# Altium PCB Array.PcbDoc
Units mm, origin at the board's own origin, x right, y up, seen from the top; angles counter-clockwise.
Board outline 150 x 30 mm, 2 copper layers (Top Layer, Bottom Layer); 20 components, 26 nets, 80 pads, 0 vias.
Unrouted connection lines stored in the file: 1.
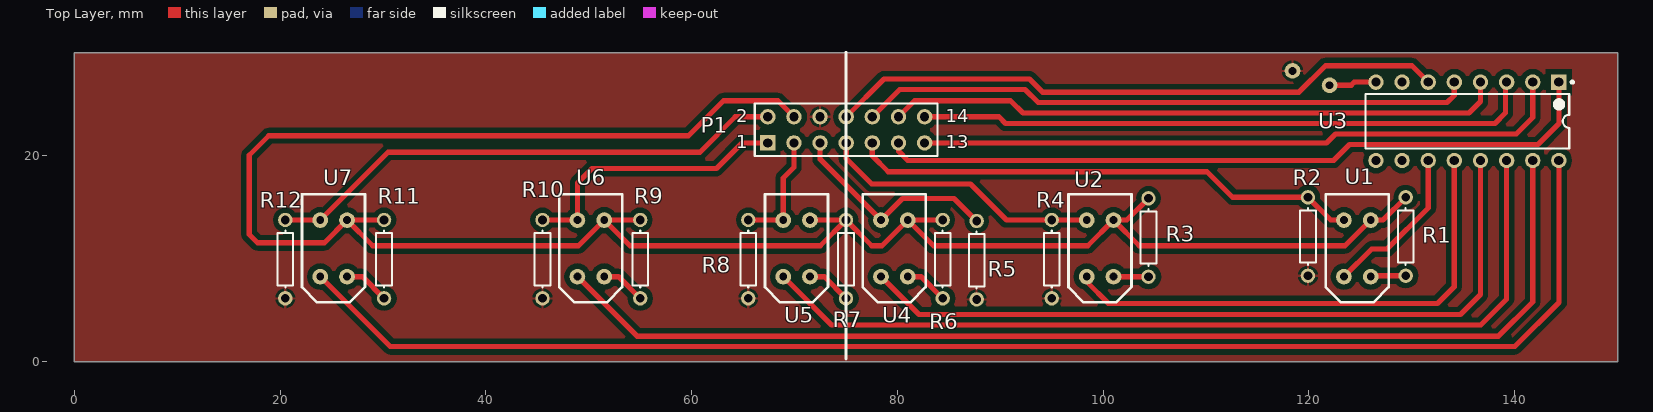
[diagram p0: Top Layer view]
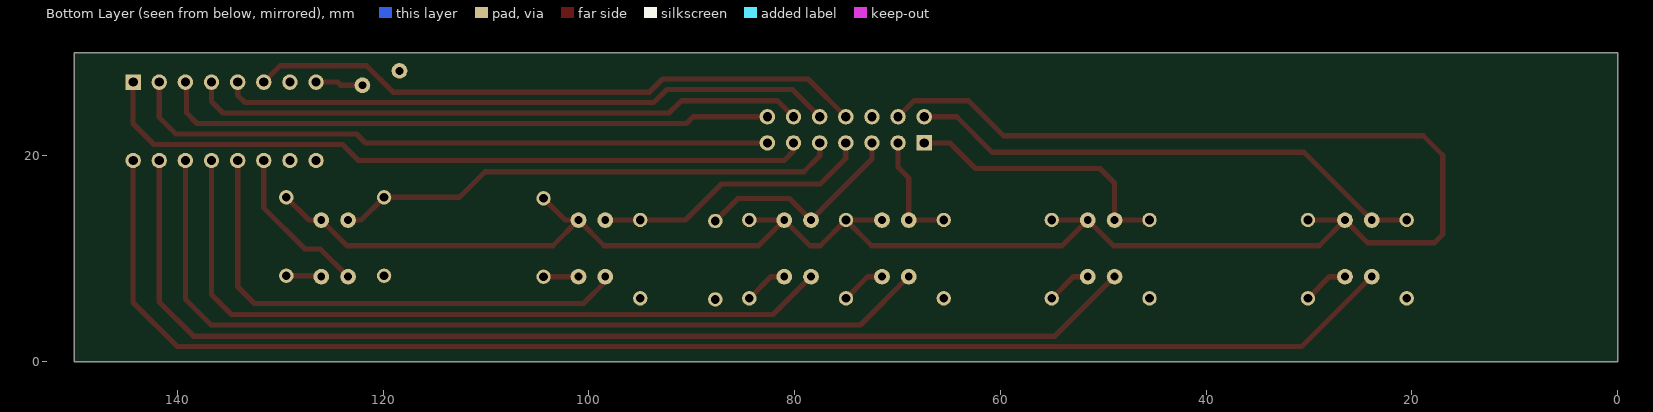
[diagram p1: Bottom Layer view, seen from below]

## Layer stack, top to bottom
Top Solder: solder mask 0.0102, Solder Resist, Dk 3.5
Top Layer: signal copper 0.0356
Dielectric 1: dielectric 0.32, FR-4, Dk 4.8
Bottom Layer: signal copper 0.0356
Bottom Solder: solder mask 0.0102, Solder Resist, Dk 3.5

## Board outline
0,0 0,30 150,30 150,0

## Design rules (kind name [scope] priority, off if disabled: settings)
Clearance [All] p1: gap=0.508
PolygonConnect [All] p1: connectstyle=Relief reliefconductorwidth=0.254 reliefentries=4 polygonreliefangle="90 Angle" airgapwidth=0.254
RoutingVias [All] p1: holewidth=0.711 width=1.27 viastyle="Through Hole" minholewidth=0.711 minwidth=1.27 maxholewidth=0.711 maxwidth=1.27
SolderMaskExpansion [All] p1: expansion=0.102
Width [All] p1: maxlimit=0.508 minlimit=0.254 preferedwidth=0.254
30 further rules are at their usual default settings.

## Components (designator, comment, footprint, x,y, rotation, side; value= is the part's Value field where it differs from the comment)
P1 "Header 7X2" HDR2X7 67.4,21.25 r0 top
R1 "Res3" AXIAL-0.3 129.4,12.15 r270 top
R2 "Res3" AXIAL-0.3 119.9,12.15 r270 top
R3 "Res3" AXIAL-0.3 104.4,12.05 r270 top
R4 "Res3" AXIAL-0.3 95,9.95 r270 top
R5 "Res3" AXIAL-0.3 84.4,9.95 r270 top
R6 "Res3" AXIAL-0.3 87.7,9.85 r270 top
R7 "Res3" AXIAL-0.3 75,9.95 r270 top
R8 "Res3" AXIAL-0.3 65.5,9.95 r270 top
R9 "Res3" AXIAL-0.3 55,9.95 r270 top
R10 "Res3" AXIAL-0.3 45.5,9.95 r270 top
R11 "Res3" AXIAL-0.3 30.1,9.95 r270 top
R12 "Res3" AXIAL-0.3 20.5,9.95 r270 top
U1 "TCRT5000" PCBComponent_1 126,13.75 r270 top
U2 "TCRT5000" PCBComponent_1 101,13.75 r270 top
U3 "ULN2003AD" NE016 135.4,23.35 r270 top
U4 "TCRT5000" PCBComponent_1 81,13.75 r270 top
U5 "TCRT5000" PCBComponent_1 71.5,13.75 r270 top
U6 "TCRT5000" PCBComponent_1 51.5,13.75 r270 top
U7 "TCRT5000" PCBComponent_1 26.5,13.75 r270 top

## Footprints (in the part's own frame and the unit in brackets; to place one, negate y for a bottom-side part, rotate by r counter-clockwise, add the part's x,y. Pads: shape width x height; smd on the part's side, far side on the other; paste and mask are expansions set on the pad)
AXIAL-0.3 [mm] "Axial Device, Thru-Hole; 2 Leads; 0.3 in Pin Spacing"
  round 1.4 hole 0.85: 1(-3.81,0) 2(3.81,0)
  silkscreen extent -2.77,-0.76 2.77,0.76
HDR2X7 [mm] "Connector; Header; 7x2 Position"
  rect 1.5x1.5 hole 0.9: 1(0,0)
  round 1.5 hole 0.9: 2(0,2.54) 3(2.54,0) 4(2.54,2.54) 5(5.08,0) 6(5.08,2.54) 7(7.62,0) 8(7.62,2.54) 9(10.16,0) 10(10.16,2.54) 11(12.7,0) 12(12.7,2.54) 13(15.24,0) 14(15.24,2.54)
  silkscreen extent -1.27,-1.27 16.51,3.81
NE016 [mm] "DIP, 16-Leads, Row Spacing 7.62mm, Pitch 2.54mm, Body 19.4x6.35mm"
  rect 1.5x1.5 hole 0.9: 1(-3.81,8.89)
  round 1.5 hole 0.9: 2(-3.81,6.35) 3(-3.81,3.81) 4(-3.81,1.27) 5(-3.81,-1.27) 6(-3.81,-3.81) 7(-3.81,-6.35) 8(-3.81,-8.89) 9(3.81,-8.89) 10(3.81,-6.35) 11(3.81,-3.81) 12(3.81,-1.27) 13(3.81,1.27) 14(3.81,3.81) 15(3.81,6.35) 16(3.81,8.89)
  silkscreen extent -3.93,-9.9 2.65,10.32, body extent -3.3,-9.9 3.3,9.9, height 5.08
PCBComponent_1 [mil]
  round 60 hole 30: 1(0,0) 2(0,-102.36) 3(216.54,0) 4(216.54,-102.36)
  silkscreen extent -98,-172 315,69

## Part data
P1: "Header, 7-Pin, Dual row"
R1 R2 R3 R4 R5 R6 R7 R8 R9 R10 R11 R12: "Resistor"
U3: "Darlington Transistor Array"

## Free pads (board coordinates)
  round 1.524 hole 0.762: 7(122,26.85) 8(118.4,28.25)

## Nets (pads, with @x,y where several pads share a name; then routed paths per layer and width w, separated by ;. In a path a pad name is that pad's centre, name@x,y a point inside that pad or via, vN(x,y) a via of type N, cw(c..) or ccw(c..) an arc to the next point about the centre after c; other vN are vias at no path point)
GND: P1.6 pad.7 pad.8 R2.2 R4.2 R6.2 R8.2 R10.2 R12.2 U3.8 | length 4.7
  Top Layer w0.508: P1.6@72.46,23.79 P1.6 ; pad.7 124.1,26.85 124.41,27.16 U3.8
NetP1_1: P1.1 R10.1 U6.2 | length 27.1
  Top Layer w0.508: R10.1 U6.2@48.89,13.76 ; U6.2 48.9,17.35 50.3,18.75 62.4,18.75 64.9,21.25 P1.1
NetP1_2: P1.2 R12.1 U7.2 | length 51
  Top Layer w0.508: R12.1 U7.2@23.89,13.76 ; U7.2 30.5,20.35 60.8,20.35 64.24,23.79 P1.2
NetP1_3: P1.3 R8.1 U5.2 | length 11.3
  Top Layer w0.508: R8.1 U5.2@68.89,13.76 ; U5.2 68.9,17.85 69.94,18.89 P1.3
NetP1_5: P1.5 R6.1 U4.2 | length 21
  Top Layer w0.508: P1.5 72.48,19.67 U4.2 80.5,15.85 85.51,15.85 R6.1
NetP1_7: P1.7 R4.1 U2.2 | length 27.4
  Top Layer w0.508: P1.7 75.02,19.73 77.5,17.25 87.1,17.25 90.59,13.76 R4.1 95.01,13.75 U2.2
NetP1_8: P1.8 U3.6 | length 60.6
  Top Layer w0.508: P1.8 78.696,27.466 92.821,27.466 94.105,26.182 119.032,26.182 121.6,28.75 130,28.75 U3.6 U3.6@131.59,27.46
NetP1_9: P1.9 R2.1 U1.2 | length 49.7
  Top Layer w0.508: P1.9 77.56,19.99 79.1,18.45 110.1,18.45 112.59,15.96 R2.1 122.11,13.75 U1.2
NetP1_10: P1.10 U3.5 | length 59.8
  Top Layer w0.508: P1.10 80.22,26.45 92.4,26.45 93.684,25.166 133.416,25.166 134.13,25.88 U3.5
NetP1_11: P1.11 U3.1 | length 70.9
  Top Layer w0.508: P1.11 80.1,20.45 81,19.55 122.4,19.55 123.952,21.102 142.252,21.102 144.29,23.14 U3.1
NetP1_12: P1.12 U3.4 | length 60.1
  Top Layer w0.508: P1.12 81.66,25.35 91,25.35 92.2,24.15 135.552,24.15 136.67,25.268 U3.4
NetP1_13: P1.13 U3.2 | length 63.6
  Top Layer w0.508: P1.13 121.7,21.25 122.568,22.118 140.152,22.118 141.75,23.716 U3.2
NetP1_14: P1.14 U3.3 | length 60.2
  Top Layer w0.508: P1.14 89.86,23.79 90.516,23.134 135.973,23.134 135.989,23.15 138.068,23.15 139.1,24.182 139.1,27.05 U3.3
NetR1_2: R1.2 U1.3 | length 3.4
  Top Layer w0.508: U1.3 126.09,8.34 R1.2
NetR3_2: R3.2 U2.3 | length 3.4
  Top Layer w0.508: U2.3 R3.2@104.4,8.25
NetR5_2: R5.2 U4.3 | length 4.3
  Top Layer w0.508: U4.3 82.29,8.25 R5.2
NetR7_2: R7.2 U5.3 | length 4.4
  Top Layer w0.508: U5.3 72.89,8.25 R7.2
NetR9_2: R9.2 U6.3 | length 4.4
  Top Layer w0.508: U6.3 52.89,8.25 R9.2
NetR11_2: R11.2 U7.3 | length 4.5
  Top Layer w0.508: U7.3 27.99,8.25 R11.2
NetU1_4: U1.4 U3.11 | length 15.6
  Top Layer w0.508: U1.4 126.1,10.95 127.6,10.95 131.59,14.94 U3.11
NetU2_4: U2.4 U3.12 | length 50.3
  Top Layer w0.508: U2.4@98.6,8.45 U2.4 98.4,7.75 100.5,5.65 132.5,5.65 134.13,7.28 U3.12
NetU3_13: U3.13 U4.4 | length 73.6
  Top Layer w0.508: U4.4 82.084,4.566 134.716,4.566 136.67,6.52 U3.13
NetU3_14: U3.14 U5.4 | length 86.8
  Top Layer w0.508: U5.4 73.6,3.55 136.7,3.55 139.21,6.06 U3.14
NetU3_15: U3.15 U6.4 | length 110.4
  Top Layer w0.508: U6.4 54.684,2.466 138.416,2.466 141.75,5.8 U3.15
NetU3_16: U3.16 U7.4 | length 138.8
  Top Layer w0.508: U7.4 30.7,1.45 140,1.45 144.29,5.74 U3.16
VCC: P1.4 R1.1 R3.1 R5.1 R7.1 R9.1 R11.1 U1.1 U2.1 U4.1 U5.1 U6.1 U7.1 | length 206.7
  Top Layer w0.508: R11.1@30.09,13.75 U7.1 ; R9.1@54.99,13.75 U6.1 ; P1.4 68.38,25.35 63.1,25.35 59.7,21.95 18.9,21.95 17,20.05 17,12.35 17.8,11.55 24.3,11.55 U7.1 ; U5.1 74.99,13.75 R7.1 ; R5.1@84.39,13.75 U4.1 ; R3.1 102.29,13.75 U2.1 ; R1.1 127.19,13.75 U1.1 123.5,11.25 103.5,11.25 U2.1 ; U7.1 29,11.25 49,11.25 U6.1 ; U6.1 54,11.25 72.49,11.25 R7.1 ; R7.1 77.51,11.25 78.5,11.25 U4.1 ; U4.1 83.5,11.25 98.5,11.25 U2.1
pads on no net: U3.7 U3.9 U3.10

## Polygon pours and split planes (outlines as drawn)
GND on Top Layer "Top Layer-No Net" (solid, pour order 4): 0,29.99 0,0.09 150,0.09 150,29.99

## Silkscreen, mask and mechanical layers (free items; w line width, h text height)
Top Overlay:
  lines w0.254: 75,0.25 75,14.85 75,25.25 75,30.05
Mechanical 1:
  the board outline again, w0.254

## Dimensions
0,30 to 0,0 on Mechanical 1
0,30 to 150,30 on Mechanical 1
0,30 to 75,25.25 on Mechanical 1

## Text inside footprints (layer, text, board x,y; h text height)
P1: Top Overlay "2" at 64.352,23.282 h1.27; Top Overlay "1" at 64.352,20.742 h1.27; Top Overlay "14" at 84.672,23.282 h1.27; Top Overlay "13" at 84.672,20.742 h1.27